# EAGLE board atmega32u4_robor (EAGLE 6.3)
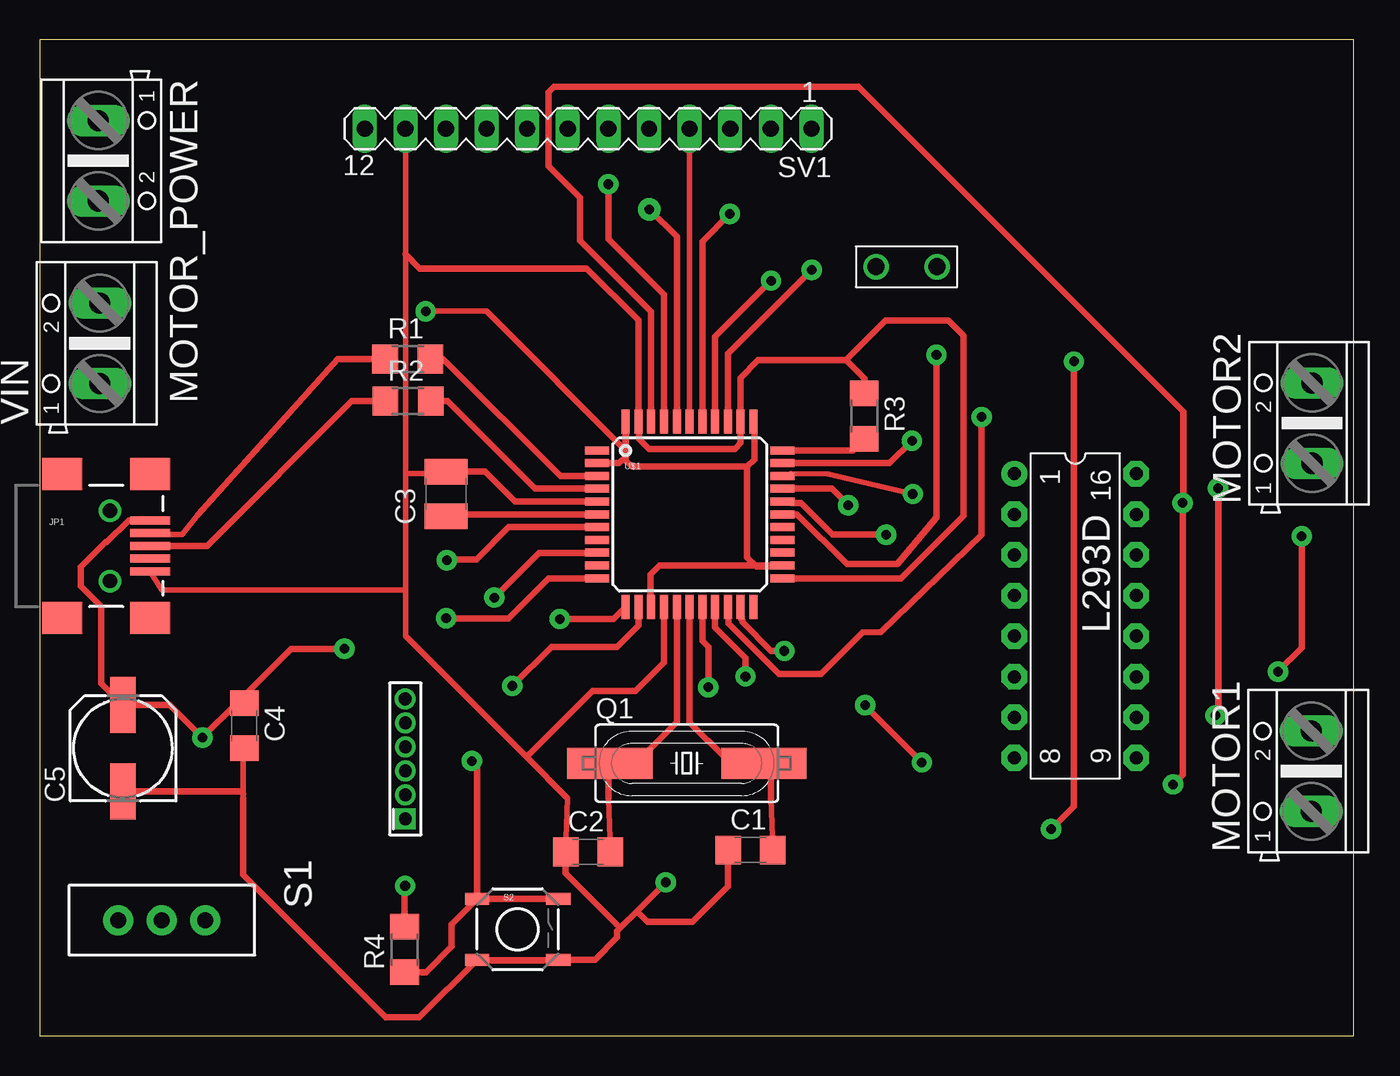
[diagram p0: board, top side]
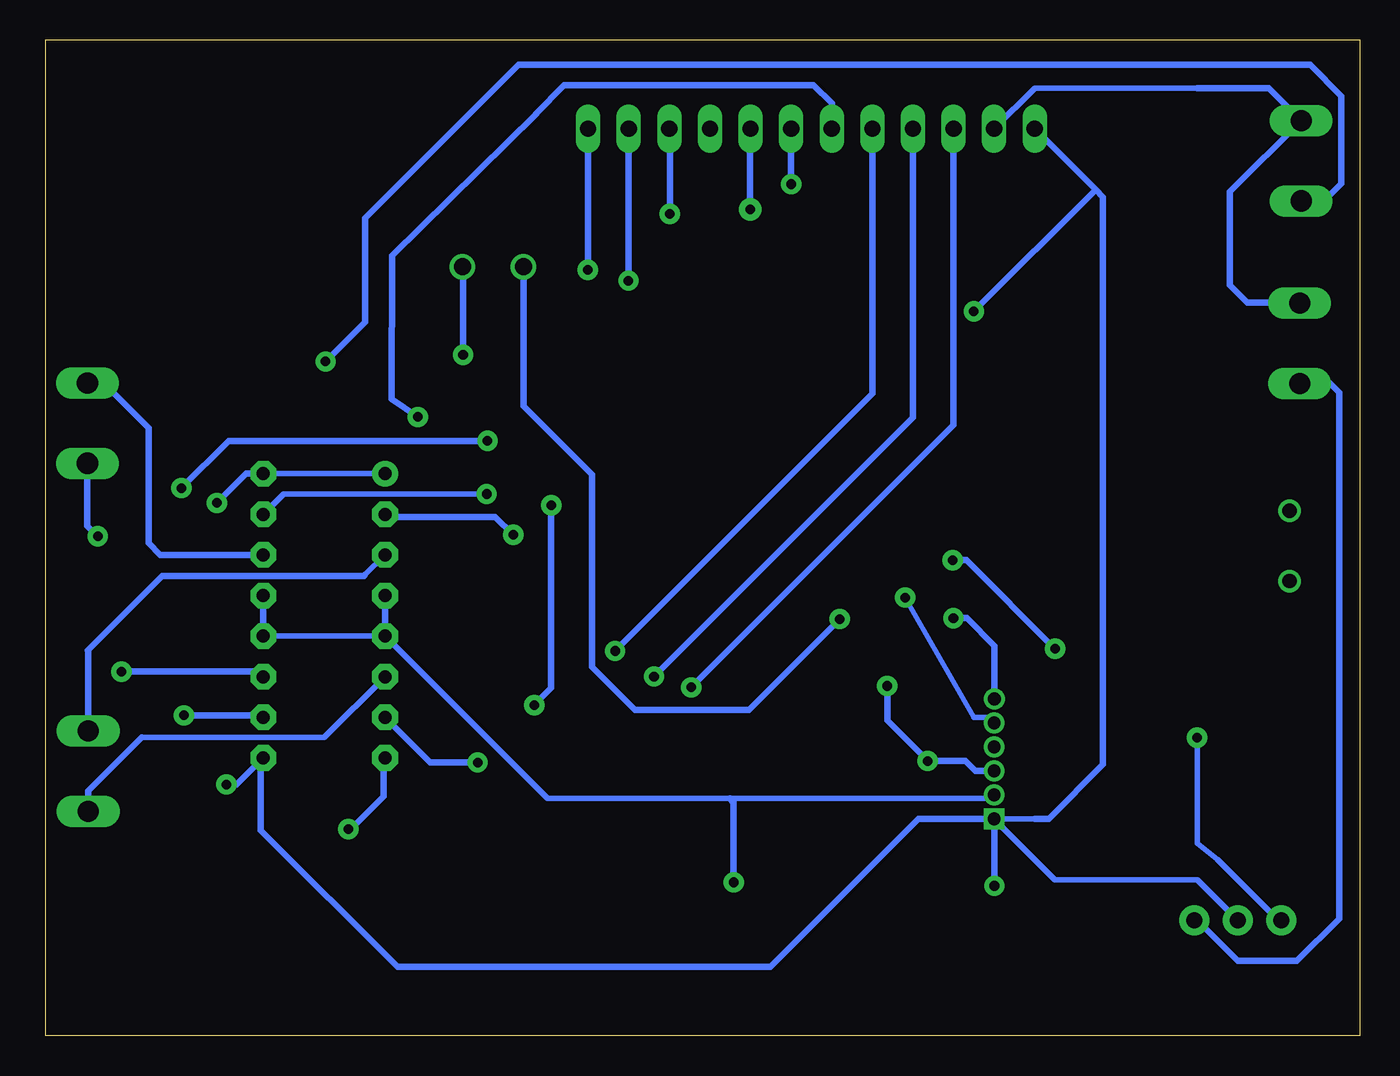
[diagram p1: board, bottom side, seen from below]

Size 82.19 x 62.32 mm. Coordinates in mm from the lower left corner, seen from the top.
Outline: 0,0 82.19,0 82.19,62.32 0,62.32 0,0
Copper layers (1*16): Top 0.035mm / dielectric 1.5mm / Bottom 0.035mm
Design rules "default *": minimum track width 14mil, minimum drill 36mil, track to track 8mil, track to pad 8mil, pad to pad 8mil, via to via 8mil, smd to smd 8mil, copper to edge 40mil, drill to drill 8mil, minimum pad ring 10mil, minimum via ring 8mil, stop-mask expansion 4mil, vias tented up to drill 0mil, thermal gap 10mil

## Footprints (pad centres in the part's own frame; a part is rotated, then mirrored left to right if it is on the bottom)
C1206 = smd 1.6 x 1.8: 1 -1.4,0; 2 1.4,0
C1210 = smd 1.6 x 2.7: 1 -1.4,0; 2 1.4,0
153CLV-0605 = smd 3.5 x 1.6: + 2.7,0; - -2.7,0
1X02_BIG = drill 1.067: P$1 0,0; P$2 3.81,0
USB-MINIB-NOSTOP = smd 2.5 x 0.5: D+ 2.5,0; D- 2.5,0.8; GND 2.5,-1.6; ID 2.5,-0.8; VBUS 2.5,1.6 | smd 2.5 x 2: G1 -3,-4.5; G2 -3,4.5; G3 2.5,4.5; G4 2.5,-4.5 | drill 0.9 pad 0.8: H1 0,2.2 | drill 0.9 pad 0.787: H2 0,-2.2
DIL16 = drill 0.813 pad 1.6: 1 -8.89,-3.81 | drill 0.813 pad 1.6 octagon: 2 -6.35,-3.81; 3 -3.81,-3.81; 4 -1.27,-3.81; 5 1.27,-3.81; 6 3.81,-3.81; 7 6.35,-3.81; 8 8.89,-3.81; 9 8.89,3.81; 10 6.35,3.81; 11 3.81,3.81; 12 1.27,3.81; 13 -1.27,3.81; 14 -3.81,3.81; 15 -6.35,3.81; 16 -8.89,3.81
AK500/2 = drill 1.321 long: 1 -2.515,0; 2 2.515,0
HC49UP = smd 5.334 x 1.93: 1 -4.826,0; 2 4.826,0
R1206 = smd 1.6 x 1.803: 1 -1.422,0; 2 1.422,0
SWITCH-SPDT_LOCK.007S = drill 1.016 pad 1.88: 1 0,2.718; 2 0,0; 3 0,-2.718
TACTILE_SWITCH_SMD = smd 1.524 x 0.762: 1 -2.54,1.905; 2 2.54,1.905; 3 -2.54,-1.905; 4 2.54,-1.905
MA12-1 = drill 1.016 long: 1 -13.97,0; 2 -11.43,0; 3 -8.89,0; 4 -6.35,0; 5 -3.81,0; 6 -1.27,0; 7 1.27,0; 8 3.81,0; 9 6.35,0; 10 8.89,0; 11 11.43,0; 12 13.97,0
SPARKFUN-DIGITALIC_TQFP44 = smd 1.5 x 0.5: 1 -5.8,4; 2 -5.8,3.2; 3 -5.8,2.4; 4 -5.8,1.6; 5 -5.8,0.8; 6 -5.8,0; 7 -5.8,-0.8; 8 -5.8,-1.6; 9 -5.8,-2.4; 10 -5.8,-3.2; 11 -5.8,-4; 23 5.8,-4; 24 5.8,-3.2; 25 5.8,-2.4; 26 5.8,-1.6; 27 5.8,-0.8; 28 5.8,0; 29 5.8,0.8; 30 5.8,1.6; 31 5.8,2.4; 32 5.8,3.2; 33 5.8,4 | smd 0.5 x 1.5: 12 -4,-5.8; 13 -3.2,-5.8; 14 -2.4,-5.8; 15 -1.6,-5.8; 16 -0.8,-5.8; 17 0,-5.8; 18 0.8,-5.8; 19 1.6,-5.8; 20 2.4,-5.8; 21 3.2,-5.8; 22 4,-5.8; 34 4,5.8; 35 3.2,5.8; 36 2.4,5.8; 37 1.6,5.8; 38 0.8,5.8; 39 0,5.8; 40 -0.8,5.8; 41 -1.6,5.8; 42 -2.4,5.8; 43 -3.2,5.8; 44 -4,5.8
AVR_MINI_PROG = drill 0.8 pad 1.27 square: 1 0,0 | drill 0.8 pad 1.27: 2 1.5,0; 3 3,0; 4 4.5,0; 5 6,0; 6 7.5,0.01

## Placement (x,y rotation side)
C1  22p  [C1206]  44.45,11.64 0 top
C2  22p  [C1206]  34.29,11.52 0 top
C3  1uF  [C1210]  25.4,33.91 90 top
C4  100n  [C1206]  12.78,19.42 270 top
C5  10uF  [153CLV-0605]  5.2,18 90 top
INT_MOTORS  [1X02_BIG]  56.12,48.13 180 top
JP1  USB-SMD-NS  [USB-MINIB-NOSTOP]  4.38,30.67 0 top
L293D  [DIL16]  64.77,26.29 270 top
MOTOR1  [AK500/2]  79.53,16.57 90 top
MOTOR2  [AK500/2]  79.58,38.35 90 top
MOTOR_POWER  [AK500/2]  3.65,54.76 270 top
Q1  [HC49UP]  40.47,17.07 0 top
R1  22R  [R1206]  23.01,42.36 0 top
R2  22R  [R1206]  23.02,39.72 0 top
R3  10K  [R1206]  51.57,38.78 270 top
R4  10K  [R1206]  22.82,5.41 90 top
S1  [SWITCH-SPDT_LOCK.007S]  7.62,7.24 270 top
S2  [TACTILE_SWITCH_SMD]  29.89,6.68 0 top
SV1  [MA12-1]  34.29,56.77 180 top
U$1  ATMEGA32U4TQFP  [SPARKFUN-DIGITALIC_TQFP44]  40.64,32.64 0 top
U$2  AVR_MINI_PROGSMD  [AVR_MINI_PROG]  22.86,13.59 90 top
VIN  [AK500/2]  3.74,43.34 90 top

## Library data of the parts
C1-C5 R1-R4 = rcl
INT_MOTORS JP1 U$2 = SparkFun-Connectors
L293D = sgs-thom
MOTOR1 MOTOR2 MOTOR_POWER VIN = con-ptr500; OC_FARNELL: unknown; OC_NEWARK: unknown
Q1 = crystal; OC_FARNELL: unknown; OC_NEWARK: unknown
S1 = SparkFun-Electromechanical
S2 = SparkFun-Electromechanical; PROD_ID: SWCH-08247
SV1 = con-lstb; OC_FARNELL: unknown; OC_NEWARK: unknown
U$1 = SparkFun-DigitalIC

## Nets
+5V: L293D.1 L293D.9 L293D.16 R4.2 S1.2 SV1.12 U$1.2 U$1.14 U$1.24 U$1.34 U$1.42 U$1.44 U$2.1
AD1: SV1.1 U$1.36
AD2: SV1.2 U$1.37
AD3: SV1.3 U$1.38
AD4: SV1.4 U$1.39
AD5: SV1.5 U$1.40
AD6: SV1.6 U$1.41
D+: R2.2 U$1.4
D-: R1.2 U$1.3
GND: C1.1 C2.1 C3.2 C4.2 C5.- JP1.GND L293D.4 L293D.5 L293D.12 L293D.13 MOTOR_POWER.1 R3.1 S2.3 S2.4 SV1.11 U$1.5 U$1.15 U$1.23 U$1.35 U$1.43 U$2.2 VIN.2
INT1: INT_MOTORS.P$1 U$1.28
INT2: INT_MOTORS.P$2 U$1.12
MISO: U$1.11 U$2.6
MOSI: U$1.10
MOTOR1_I1: L293D.2 U$1.29
MOTOR1_I2: L293D.7 U$1.30
MOTOR1_O1: L293D.3 MOTOR1.2
MOTOR1_O2: L293D.6 MOTOR1.1
MOTOR2_I1: L293D.15 U$1.31
MOTOR2_I2: L293D.10 U$1.32
MOTOR2_O1: L293D.14 MOTOR2.2
MOTOR2_O2: L293D.11 MOTOR2.1
N$1: C1.2 Q1.2 U$1.17
N$2: C2.2 Q1.1 U$1.16
N$3: C3.1 U$1.6
N$4: JP1.D- R1.1
N$5: JP1.D+ R2.1
N$6: R3.2 U$1.33
N$8: R4.1 S2.1 S2.2 U$1.13 U$2.3
RX: SV1.7 U$1.20
SCK: U$1.9 U$2.5
SCL: SV1.10 U$1.18
SDA: SV1.9 U$1.19
TX: SV1.8 U$1.21
UBUS: C4.1 C5.+ JP1.VBUS S1.3 U$1.7
VIN: S1.1 VIN.1
VPOWER: L293D.8 MOTOR_POWER.2

## Tracks (layer width: path | path; a pad name or v marks a point on that pad's centre or on a via)
+5V  (via drill 0.6 pad 1.27)
  Top 0.356: v24.13,45.34 27.94,45.34 36.83,36.45 36.64,36.45
  Top 0.406: R4.2 22.82,9.37 v22.84,9.4 | v70.89,15.74 71.49,16.34 v71.49,33.35 71.52,33.39 71.52,39.06 51.2,59.38 32.15,59.38 31.82,59.06 31.82,54.41 33.79,52.44 33.79,49.77 38.24,45.32 U$1.42 | U$1.2 36.23,35.84 36.65,36.26 36.65,38.43 U$1.44 36.64,36.45 36.64,36.02 37.03,35.63 44.25,35.63 | U$1.34 44.72,38.36 44.72,37.89 44.7,37.88 44.7,36.08 44.25,35.63 | 44.25,35.63 44.25,29.95 44.82,29.38 46.38,29.38 U$1.24 38.77,29.44 38.2,28.87 38.2,26.88 U$1.14
  Bottom 0.356: L293D.16 L293D.1 | S1.2 10.16,9.78 19.05,9.78 U$2.1 20.32,13.59 | 16.51,52.96 v24.13,45.34
  Bottom 0.406: v22.84,9.4 22.84,13.58 U$2.1 27.59,13.59 36.85,4.33 60.19,4.33 68.74,12.87 68.74,17.24 L293D.9 70.24,15.74 v70.89,15.74 | L293D.16 69.66,35.18 v71.49,33.35 | 20.32,13.59 19.45,13.59 16.05,16.99 16.05,52.5 16.51,52.96 SV1.12
AD1  (via drill 0.6 pad 1.27)
  Top 0.406: U$1.36 43.04,42.69 v48.28,47.93
  Bottom 0.406: v48.28,47.93 48.28,56.75 SV1.1
AD2  (via drill 0.6 pad 1.27)
  Top 0.406: U$1.37 42.24,43.76 v45.74,47.26
  Bottom 0.406: v45.74,47.26 45.74,56.75 SV1.2
AD3  (via drill 0.6 pad 1.27)
  Top 0.406: U$1.38 41.44,49.72 v43.15,51.43
  Bottom 0.406: v43.15,51.43 43.15,56.74 SV1.3
AD4
  Top 0.356: SV1.4 U$1.39
AD5  (via drill 0.6 pad 1.42)
  Top 0.406: U$1.40 39.84,50 v38.12,51.72
  Bottom 0.406: v38.12,51.72 38.12,56.75 SV1.5
AD6  (via drill 0.6 pad 1.27)
  Top 0.406: U$1.41 39.04,46.38 35.56,49.86 v35.56,53.3
  Bottom 0.406: v35.56,53.3 SV1.6
D+
  Top 0.406: R2.2 25.52,39.72 30.99,34.25 U$1.4
D-
  Top 0.406: R1.2 25.23,42.36 32.56,35.03 U$1.3
GND  (via drill 0.6 pad 1.27)
  Top 0.356: SV1.11 22.86,48.91 22.86,35.18 | 22.86,35.18 22.86,27.91 | 22.86,27.91 22.86,25.02 30.43,17.45 33.02,14.86 C2.1 | 22.86,35.18 25.4,35.18 C3.2 | 22.86,27.91 7.62,27.91 JP1.GND | 12.7,14.86 12.7,15.15 12.7,17.4 C4.2
  Top 0.406: R3.1 51.57,41.13 50.42,42.28 | 50.42,42.28 44.93,42.28 43.84,41.18 U$1.35 | U$1.35 | U$1.5 29.74,33.44 27.86,35.32 25.41,35.32 C3.2 | 36.3,6.77 36.1,6.57 36.1,6.16 34.71,4.77 S2.4 32.36,4.77 32.31,4.72 27.39,4.72 S2.3 23.73,1.16 21.62,1.16 12.7,10.07 12.7,14.86 | 36.3,6.77 37.35,7.81 | 37.35,7.81 v39.15,9.61 | C1.1 43.05,9.37 40.83,7.15 38.01,7.15 37.35,7.81 | 22.86,48.91 23.75,48.02 34.21,48.02 37.44,44.79 U$1.43 37.48,38.4 37.48,37.35 38.1,36.73 43.47,36.73 43.84,37.1 U$1.35 | U$1.15 39.04,23.36 37.26,21.58 34.56,21.58 30.43,17.45 | U$1.23 53.87,28.64 57.77,32.54 57.77,43.83 56.83,44.77 52.91,44.77 50.42,42.28 | C5.- 12.54,15.3 12.7,15.15 | C2.1 32.89,10.18 36.3,6.77
  Bottom 0.356: L293D.12 L293D.5 50.8,14.86 39.38,14.86 22.86,14.86 U$2.2 | 10.16,59.31 20.32,59.31 SV1.11
  Bottom 0.406: v39.15,9.61 39.15,14.63 39.38,14.86 | L293D.12 L293D.13 | L293D.4 L293D.5 | VIN.2 3.77,45.88 7.01,45.88 8.11,46.97 8.11,52.82 MOTOR_POWER.1 5.68,59.31 10.16,59.31
INT1  (via drill 0.6 pad 1.27)
  Top 0.406: U$1.28 47.38,32.64 50.48,29.53 53.64,29.53 56.08,32.45 v56.08,42.61
  Bottom 0.406: v56.08,42.61 56.08,48.1 INT_MOTORS.P$1
INT2  (via drill 0.6 pad 1.27)
  Top 0.406: v32.51,26.09 35.89,26.09 U$1.12
  Bottom 0.406: INT_MOTORS.P$2 52.31,39.43 48.02,35.15 48.02,23.1 45.34,20.42 38.19,20.42 v32.51,26.09
MISO  (via drill 0.6 pad 1.27)
  Top 0.406: U$1.11 31.83,28.64 29.3,26.11 25.44,26.11 v25.41,26.14
  Bottom 0.406: v25.41,26.14 24.58,26.14 22.85,24.41 U$2.6
MOTOR1_I1  (via drill 0.6 pad 1.27)
  Top 0.406: v52.95,31.37 49.59,31.37 47.59,33.36 47.06,33.36 46.96,33.46 46.46,33.46 U$1.29
  Bottom 0.406: L293D.2 60.96,32.5 60.94,32.49 54.07,32.49 v52.95,31.37
MOTOR1_I2  (via drill 0.6 pad 1.27)
  Top 0.406: U$1.30 49.55,34.24 v50.57,33.22 | v51.63,20.71 51.63,20.66 v55.17,17.11
  Bottom 0.406: v50.57,33.22 50.57,21.77 v51.63,20.71 | v55.17,17.11 58.13,17.11 L293D.7
MOTOR1_O1
  Bottom 0.356: L293D.3 62.23,28.83
  Bottom 0.406: 62.23,28.83 62.27,28.79 74.9,28.79 79.57,24.11 79.53,24.08 MOTOR1.2
MOTOR1_O2
  Bottom 0.356: 76.2,18.67 64.77,18.67 L293D.6
  Bottom 0.406: MOTOR1.1 79.53,15.34 76.2,18.67
MOTOR2_I1  (via drill 0.6 pad 1.27)
  Top 0.356: v54.61,33.91 49.3,35.16 46.99,35.18 U$1.31
  Bottom 0.356: v54.61,33.91 67.31,33.91 L293D.15
MOTOR2_I2  (via drill 0.6 pad 1.27)
  Top 0.406: U$1.32 53.16,35.84 v54.56,37.24 | v73.71,34.28 73.71,20.22 v73.55,20.06
  Bottom 0.406: v54.56,37.24 70.76,37.24 v73.71,34.28 | v73.55,20.06 68.7,20.06 L293D.10
MOTOR2_O1
  Bottom 0.406: L293D.14 75.02,30.1 75.76,30.84 75.76,35.32 75.75,35.32 75.75,38.05 78.56,40.86 MOTOR2.2
MOTOR2_O2  (via drill 0.6 pad 1.27)
  Top 0.406: v78.94,31.26 78.94,24.3 v77.45,22.8
  Bottom 0.406: v77.45,22.8 68.9,22.8 L293D.11 | v78.94,31.26 79.58,31.91 MOTOR2.1
N$1
  Top 0.356: 45.72,14.86 C1.2
  Top 0.406: 45.72,14.86 45.72,16.64 Q1.2 45.06,16.83 43.45,16.83 41.81,18.47 41.79,18.47 40.64,19.61 U$1.17
N$2
  Top 0.356: 35.56,14.86 C2.2
  Top 0.406: 35.56,14.86 35.56,16.99 Q1.1 35.71,17 37.19,17 39.84,19.65 U$1.16
N$3
  Top 0.406: U$1.6 25.53,32.64 C3.1
N$4
  Top 0.356: 9.89,32.64 8.89,31.37 7.62,31.37 JP1.D-
  Top 0.406: R1.1 18.61,42.36 9.89,32.64
N$5
  Top 0.406: R2.1 19.51,39.72 10.46,30.67 JP1.D+
N$6
  Top 0.406: U$1.33 50.85,36.64 R3.2
N$8  (via drill 0.6 pad 1.27)
  Top 0.406: R4.1 24.15,3.99 25.77,5.61 25.77,7 S2.1 | S2.2 S2.1 | S2.1 27.34,16.88 v27.01,17.21 | U$1.13 37.44,25.68 36.11,24.35 32,24.35 v29.55,21.91
  Bottom 0.406: U$2.3 24.04,16.59 24.67,17.21 v27.01,17.21 29.55,19.75 v29.55,21.91
RX  (via drill 0.6 pad 1.27)
  Top 0.406: v58.91,38.73 58.91,31.36 52.6,25.28 51.45,25.25 48.86,22.65 46.23,22.65 43.06,25.82 43.06,26.82 U$1.20
  Bottom 0.406: SV1.7 33.02,58.35 34.15,59.48 49.76,59.48 51.53,57.71 51.53,57.69 60.53,48.84 60.56,39.85 v58.91,38.73
SCK  (via drill 0.6 pad 1.27)
  Top 0.406: v28.43,27.43 31.1,30.1 31.23,30.23 U$1.9
  Bottom 0.356: v28.43,27.43 24.13,19.94 22.86,19.94 U$2.5
SCL  (via drill 0.6 pad 1.27)
  Top 0.406: v41.81,21.81 41.81,24.34 41.44,24.71 U$1.18
  Bottom 0.406: SV1.10 25.4,38.23 v41.81,21.81
SDA  (via drill 0.6 pad 1.27)
  Top 0.406: v44.14,22.5 44.14,23.65 42.23,25.56 42.23,26.83 U$1.19
  Bottom 0.406: SV1.9 27.94,38.7 v44.14,22.5
TX  (via drill 0.6 pad 1.27)
  Top 0.406: v46.57,24.09 45.74,24.09 43.94,25.89 43.94,26 43.88,26.06 43.88,26.81 U$1.21
  Bottom 0.406: SV1.8 30.48,40.18 v46.57,24.09
UBUS  (via drill 0.6 pad 1.27)
  Top 0.356: v10.16,18.67 12.29,20.8 12.7,21.21 C4.1 | 5.08,7.24 S1.3
  Top 0.406: JP1.VBUS 5.54,32.27 4.19,30.92 4.12,30.92 2.56,29.36 2.56,28.15 3.83,26.87 3.83,22.07 C5.+ 8.13,20.7 v10.16,18.67 | U$1.7 29.33,31.84 27.3,29.82 25.5,29.82 v25.46,29.78 | v19.05,24.23 15.72,24.23 12.29,20.8
  Bottom 0.356: v10.16,18.67 10.16,12.05 8.89,11.05 5.08,7.24 S1.3
  Bottom 0.406: v25.46,29.78 24.59,29.78 v19.05,24.23
VIN
  Bottom 0.356: 7.62,4.7 10.16,7.24 S1.1
  Bottom 0.406: VIN.1 1.84,40.83 1.27,40.26 1.28,40.25 1.28,7.34 3.92,4.7 7.62,4.7
VPOWER  (via drill 0.6 pad 1.27)
  Top 0.406: v64.69,42.2 64.69,14.37 v63.25,12.94
  Bottom 0.406: v64.69,42.2 62.21,44.68 62.21,51.16 52.6,60.77 3.09,60.77 1.13,58.81 1.13,53.34 2.17,52.31 3.59,52.31 MOTOR_POWER.2 | v63.25,12.94 63.13,12.94 61.06,15.01 61.06,17.3 L293D.8